# Altium PCB attenuator.PcbDoc
Units mm, origin at the board's own origin, x right, y up, seen from the top; angles counter-clockwise.
Board outline 25 x 21 mm, 2 copper layers (Top Layer, Bottom Layer), stack 0.581 mm thick; 16 components, 12 nets, 62 pads, 52 vias.
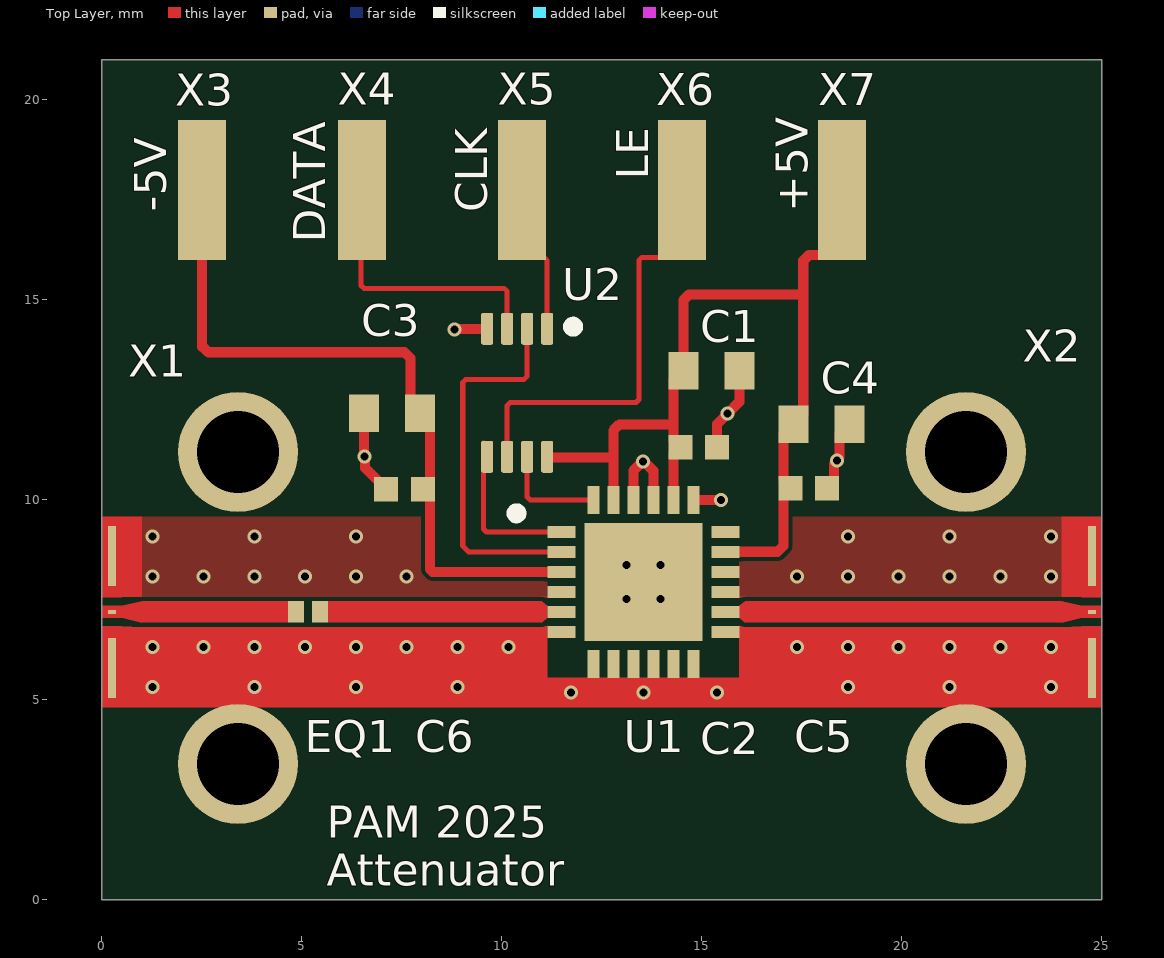
[diagram p0: Top Layer view]
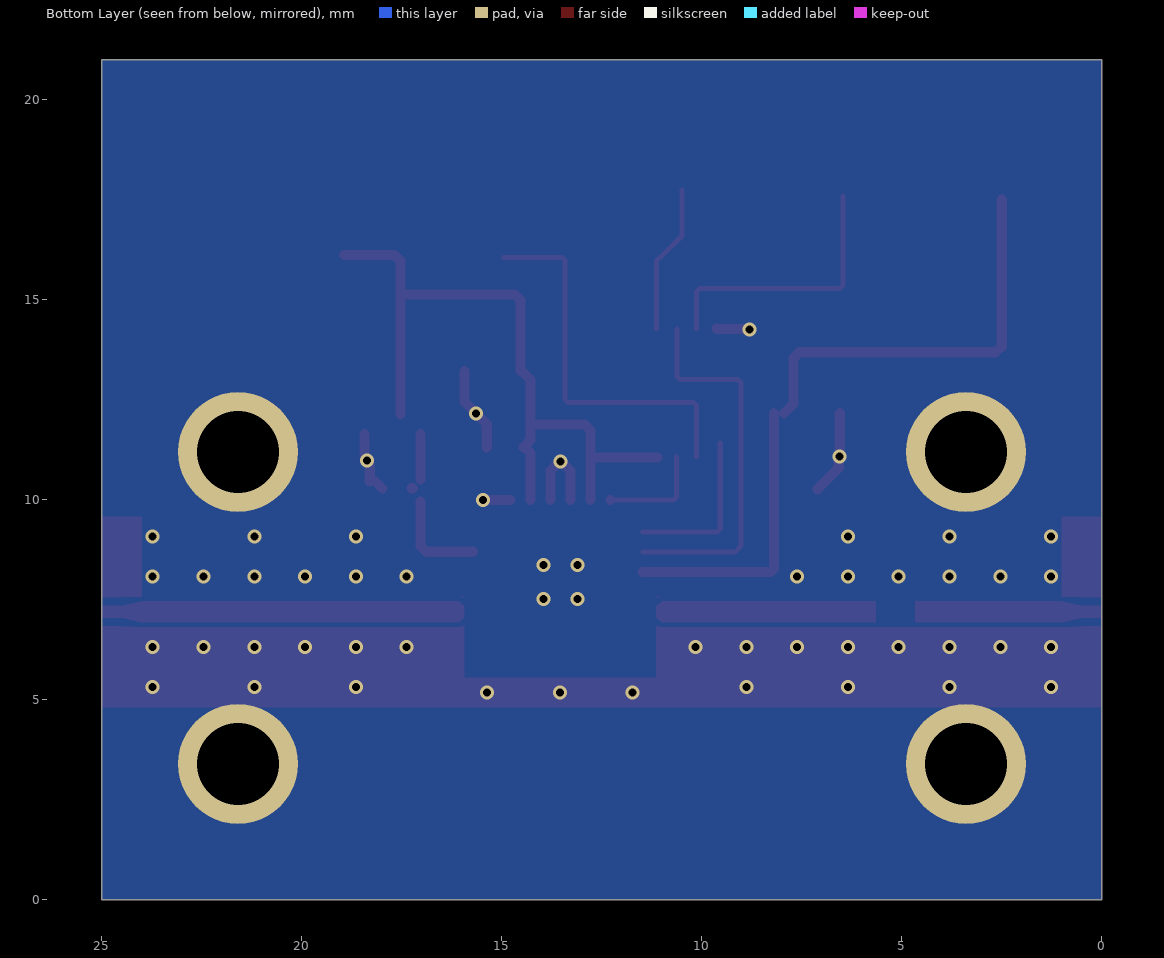
[diagram p1: Bottom Layer view, seen from below]
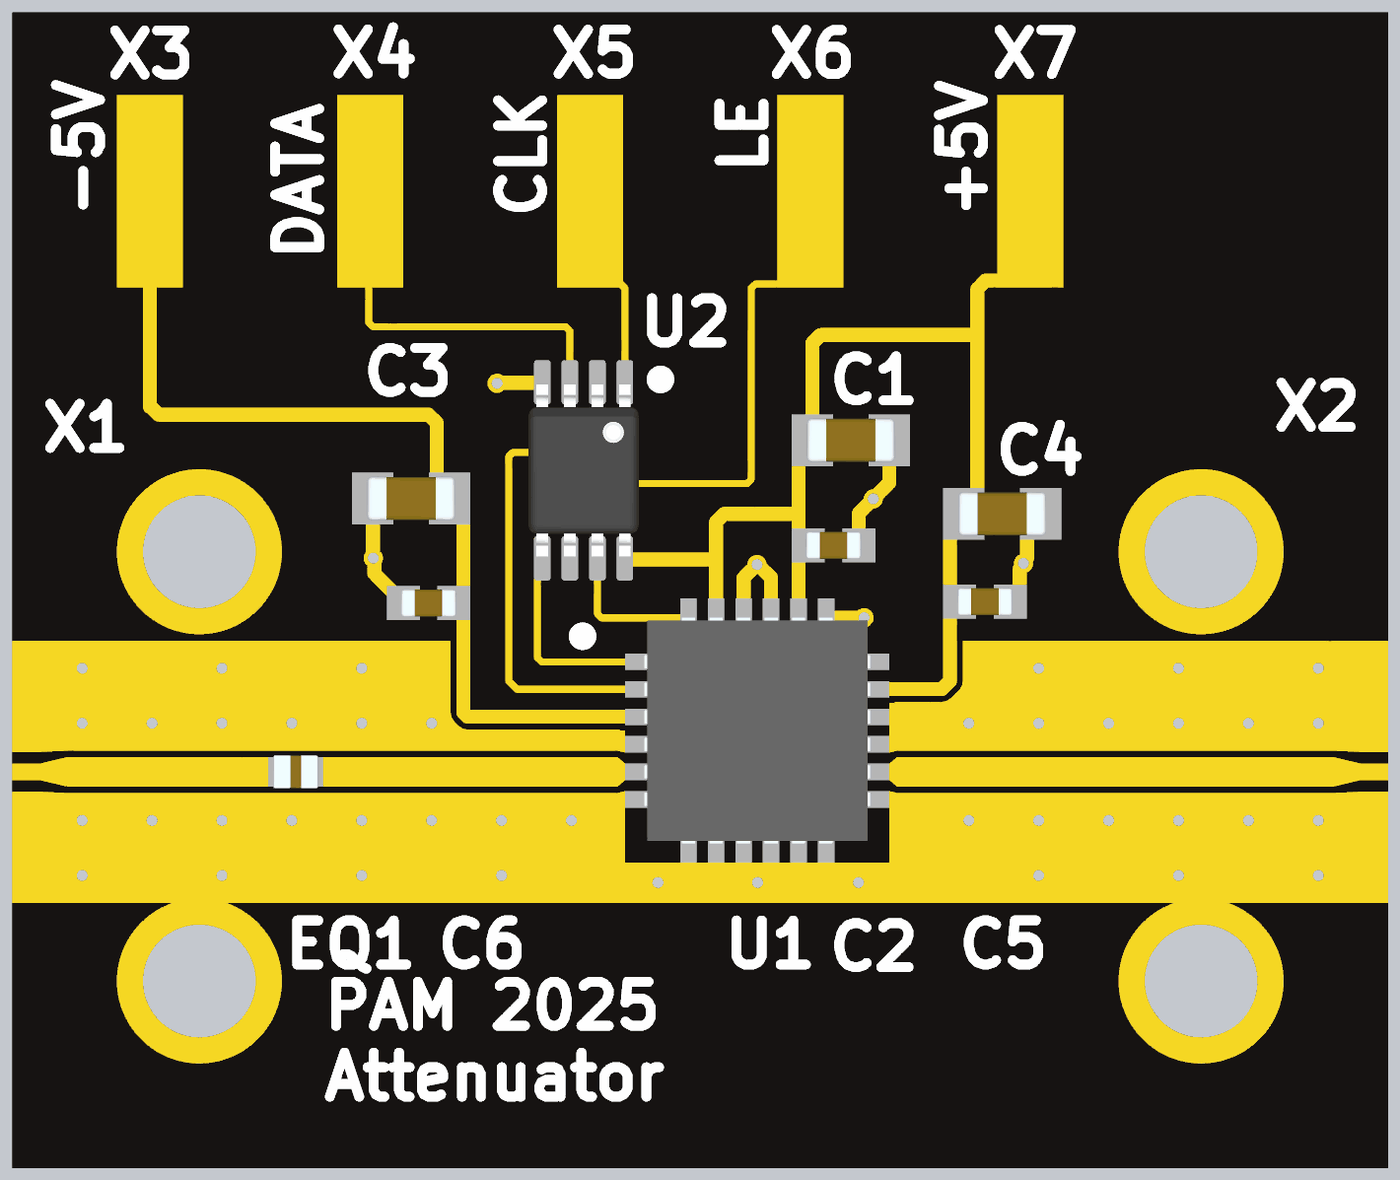
[diagram p2: 3D render of the assembled board from above, using the file's embedded part models]

## Layer stack, top to bottom
Top Layer: signal copper 0.0356
Dielectric 1: dielectric 0.51, Rogers 4350B, Dk 3.48
Bottom Layer: signal copper 0.0356

## Board outline
0,0 25,0 25,21 0,21

## Design rules (kind name [scope] priority, off if disabled: settings)
Clearance [All] p1: gap=0.1 ignorepadtopadclearanceinfootprint=FALSE
HoleSize [All] p1: absolutevalues=TRUE maxlimit=5 minlimit=0.01 maxpercent=80.000 minpercent=20.000
MinimumSolderMaskSliver [All] p1: minsoldermaskwidth=0.15
PlaneConnect [All] p1: planeconnectstyle=Direct reliefexpansion=0.508 reliefentries=4 reliefconductorwidth=0.254 reliefairgap=0.254
PolygonConnect [All] p1: connectstyle=Direct reliefconductorwidth=0.254 reliefentries=4 polygonreliefangle="90 Angle" airgapwidth=0.254
RoutingVias [All] p1: holewidth=0.711 width=1.27 viastyle="Through Hole" minholewidth=0.1 minwidth=0.01 maxholewidth=5 maxwidth=5
SilkToSilkClearance [All] p1: silktosilkclearance=0.15
SilkToSolderMaskClearance [IsPad] p1: minsilkscreentomaskgap=0.15 clearancetoexposedcopper=TRUE
SolderMaskExpansion [All] p1: expansion=0.102 istentingtop=FALSE
SupplyNets "Schematic Supply Nets" [InNet('GND')] p1: voltage=0.000
Width [All] p1: maxlimit=0.254 minlimit=0.125 preferedwidth=0.254
25 further rules are at their usual default settings.

## Classes and differential pairs
component class attenuator: C1 C2 C3 C4 C5 C6 U1 U2 X1 X2 X3 X4 X5 X6 X7

## Components (designator, comment, footprint, x,y, rotation, side; value= is the part's Value field where it differs from the comment)
C1 "1000 pF" C1000pF__C100nF 15.236,13.226 r0 top value=1nF
C2 "100 pF" C100pF 14.921,11.318 r0 top
C3 "1000 pF" C1000pF__C100nF 7.247,12.167 r0 top value=1nF
C4 "1000 pF" C1000pF__C100nF 17.987,11.889 r0 top value=1nF
C5 "100 pF" C100pF 17.672,10.291 r0 top
C6 "100 pF" C100pF 7.564,10.267 r0 top
EQ1 "AEQ05472-10" EQ_AEQ05472 5.15,7.2 r0 top locked
U1 "HMC1018ALP4E" ATT_HMC101018ALPE 13.537,7.95 r0 top
U2 "SN74LVC3G07DCUT" Buf_SN74LVC3G07DCUT 10.381,12.679 r270 top
X1 "Solder Pad" "CPW EDGE CONNECTOR" 0.25,7.2 r90 top
X2 "Solder Pad" "CPW EDGE CONNECTOR" 24.75,7.2 r270 top
X3 "Solder Pad" "Solder Pad" 2.5,17.75 r0 top
X4 "Solder Pad" "Solder Pad" 6.5,17.75 r0 top
X5 "Solder Pad" "Solder Pad" 10.5,17.75 r0 top
X6 "Solder Pad" "Solder Pad" 14.5,17.75 r0 top
X7 "Solder Pad" "Solder Pad" 18.5,17.75 r0 top

## Footprints (in the part's own frame and the unit in brackets; to place one, negate y for a bottom-side part, rotate by r counter-clockwise, add the part's x,y. Pads: shape width x height; smd on the part's side, far side on the other; paste and mask are expansions set on the pad)
ATT_HMC101018ALPE [mm]
  rect 0.7x0.3 smd: 1(-2.05,1.25) 2(-2.05,0.75) 3(-2.05,0.25) 4(-2.05,-0.25) 5(-2.05,-0.75) 6(-2.05,-1.25) 13(2.05,-1.25) 14(2.05,-0.75) 15(2.05,-0.25) 16(2.05,0.25) 17(2.05,0.75) 18(2.05,1.25)
  rect 0.3x0.7 smd: 7(-1.25,-2.05) 8(-0.75,-2.05) 9(-0.25,-2.05) 10(0.25,-2.05) 11(0.75,-2.05) 12(1.25,-2.05) 19(1.25,2.05) 20(0.75,2.05) 21(0.25,2.05) 22(-0.25,2.05) 23(-0.75,2.05) 24(-1.25,2.05)
  rect 2.95x2.95 smd: 25(0,0)
  silkscreen extent -3.3,1.59 -3.05,1.84, body extent -2.05,-2.05 2.05,2.05, height 1
Buf_SN74LVC3G07DCUT [mm] "SOP, 8-Leads, Body 2.4x2.1mm, Pitch 0.5mm, IPC Medium Density"
  rrect33% 0.8x0.3 smd: 1(-1.6,0.75) 2(-1.6,0.25) 3(-1.6,-0.25) 4(-1.6,-0.75) 5(1.6,-0.75) 6(1.6,-0.25) 7(1.6,0.25) 8(1.6,0.75)
  silkscreen extent -1.78,1.27 -1.53,1.52, body extent -1.56,-1 1.56,1, height 0.9
C100pF [mm]
  rect 0.6x0.62 smd: 1(-0.46,0) 2(0.46,0)
  body extent -0.5,-0.25 0.5,0.25, height 0.55
C1000pF__C100nF [mm]
  rect 0.75x0.94 smd: 1(-0.7,0) 2(0.7,0)
  body extent -0.8,-0.4 0.8,0.4, height 0.9
"CPW EDGE CONNECTOR" [mm]
  rect 0.1x0.2 smd paste-2539.97 mask-10: 1(0,0)
  rect 1.5x0.2 smd paste-2539.97 mask-10: 2(-1.4,0) 3(1.4,0)
  Top Layer region: -2.383,0.25 -0.361,0.25 -0.361,-0.25 -0.383,-0.75 -2.383,-0.75
  Top Layer region: -0.15,0.25 0.15,0.25 0.15,-0.25 0.269,-0.75 -0.269,-0.75 -0.15,-0.25
  Top Layer region: 2.383,0.25 0.361,0.25 0.361,-0.25 0.383,-0.75 2.383,-0.75
EQ_AEQ05472 [mm]
  rect 0.4x0.538 smd: 1(-0.3,0) 2(0.3,0)
  body extent -0.4,-0.3 0.4,0.3, height 0.14
"Solder Pad" [mm]
  rect 1.2x3.5 smd paste-2539.97: 1(0,0)

## Part data
C1 C3 C4: library part C1000pF_GCM1885C1H102FA16D, "Ceramic Capacitor, Multilayer, Ceramic, 50V, 1% +Tol, 1% -Tol, C0G, 30ppm/Cel TC, 0.001uF, Surface Mount, 0603", Capacitor Type=Ceramic, Case/Package=0603, Manufacturer=Murata, Manufacturer Part Number=GCM1885C1H102FA16D, Max Operating Temperature=125°C, Min Operating Temperature=-55°C, Package Shape=Rectangular, Rated DC Voltage (URdc)=50V, Supplier Part Number=81-GCM1885C1H102FA6D, Temperature Characteristics Code=C0G, Tolerance  (fill in as +-)=1%, Category="Ceramic Capacitors", ComponentLink1Description=https://datasheet.ciiva.com:443/pdfs/VipMasterIC/IC/MURE/MURE-S-A0004370842/MURE-S-A0004372260-1.pdf?src-supplier=IHS+Markit, ComponentLink1URL=https://datasheet.ciiva.com:443/pdfs/VipMasterIC/IC/MURE/MURE-S-A0004370842/MURE-S-A0004372260-1.pdf?src-supplier=IHS+Markit, Dielectric Material=Ceramic, Mounting Technology="Surface Mount", Multilayer=Yes, Packaging="Tape and Reel", Pins=2, Pricing="1=0.35, 10=0.229, 50=0.229, 100=0.138, 1000=0.092, 10000=0.074 (USD)", Reach SVHC Compliant=Yes, Reference Standard=AEC-Q200, RoHS=Yes, RoHS Compliant=Yes, Stock=27229, Supplier=Mouser, Termination=Wraparound, Tolerance (fill in as +-)=1%
C2 C5 C6: library part C100pF_GRM1555C2A101FA01D, "Multilayer Ceramic Capacitors MLCC - SMD/SMT 100 pF 100 VDC 1% 0402 C0G (NP0)", Manufacturer=Murata, Manufacturer Part Number=GRM1555C2A101FA01D, Supplier Part Number=81-GRM1555C2A11FA1D, Pricing="1=0.18, 10=0.119, 50=0.119, 100=0.06, 1000=0.039, 10000=0.035 (USD)", RoHS=No, Stock=21646, Supplier=Mouser
EQ1: library part EQ_AEQ05472-10, "Rf Filter Gain Equalizer 2SMD", Manufacturer="Knowles Dielectric Labs", Supplier Part Number=1761-1006-ND, ComponentLink1Description=http://www.mouser.com/ds/2/110/Dielectriclaboratories_EW_Series-340573.pdf?src-supplier=Mouser, ComponentLink1URL=http://www.mouser.com/ds/2/110/Dielectriclaboratories_EW_Series-340573.pdf?src-supplier=Mouser, ComponentLink2Description=http://www.knowlescapacitors.com/getattachment/69df7735-7ed2-4c4f-903b-a99acda4fa2d/Gain-Equalizers.aspx?src-supplier=Digikey, ComponentLink2URL=http://www.knowlescapacitors.com/getattachment/69df7735-7ed2-4c4f-903b-a99acda4fa2d/Gain-Equalizers.aspx?src-supplier=Digikey, Manufacturer Part Number=AEQ05472-10, Pricing="10=7.145, 20=6.5195, 30=6.203, 50=5.8498, 70=5.64214, 100=5.4415, 250=5.00556, 500=4.7401, 1000=4.51981 (USD)", RoHS=Yes, Stock=390, Supplier=Digikey
U1: library part Att_HMC1018ALP4E, "Attenuators Attenuators", Manufacturer_Name="Analog Devices", Mouser Part Number=584-HMC1018ALP4E, Datasheet Link=https://www.analog.com/media/en/technical-documentation/data-sheets/hmc1018a.pdf, Geometry.Height=1mm, Manufacturer_Part_Number=HMC1018ALP4E, Mouser Price/Stock=https://www.mouser.co.uk/ProductDetail/Analog-Devices/HMC1018ALP4E?qs=XflvcvBPbgW0VxFFfcxVBA%3D%3D
U2: library part Buf_SN74LVC3G07DCUT, "Buffer, LVC/LCX/Z Series, 3-Func, 1-Input, CMOS, PDSO8", Case/Package=VSSOP, Load Capacitance (CL)=50pF, Manufacturer="Texas Instruments", Max Operating Temperature=125°C, Max Supply Voltage=5.5V, Min Operating Temperature=-40°C, Min Supply Voltage=1.65V, Nominal Supply Voltage=1.8V, Package Body Material=Plastic, Package Shape=Rectangular, Package Style="SMALL OUTLINE, VERY THIN PROFILE, SHRINK PITCHMeter", Peak Reflow Temperature (Cel)=260°C, Power Supplies=3.3V, Supplier Part Number=595-SN74LVC3G07DCUT, Temperature Grade=AUTOMOTIVE, Category="Buffers, Drivers and Transceivers", Channels=3, ComponentLink1Description=https://www.ti.com:443/lit/ds/symlink/sn74lvc3g07.pdf?src-supplier=IHS+Markit, ComponentLink1URL=https://www.ti.com:443/lit/ds/symlink/sn74lvc3g07.pdf?src-supplier=IHS+Markit, ComponentLink2Description=https://datasheet.ciiva.com/22704/1831202-22704940.pdf?src-supplier=Element14, ComponentLink2URL=https://datasheet.ciiva.com/22704/1831202-22704940.pdf?src-supplier=Element14, ComponentLink3Description=https://datasheet.ciiva.com/15094/getdatasheetpartid-42252-15094217.pdf?src-supplier=Verical, ComponentLink3URL=https://datasheet.ciiva.com/15094/getdatasheetpartid-42252-15094217.pdf?src-supplier=Verical, ComponentLink4Description=https://datasheet.ciiva.com/41455/001017196-da-01-en-ic-b-dvr-trp-sn74lvc3g07dcut-vssop-8-tid-41455972.pdf?src-supplier=Conrad, ComponentLink4URL=https://datasheet.ciiva.com/41455/001017196-da-01-en-ic-b-dvr-trp-sn74lvc3g07dcut-vssop-8-tid-41455972.pdf?src-supplier=Conrad, ComponentLink5Description=https://datasheet.ciiva.com/7744/sn74lvc3g07-7744042.pdf?src-supplier=Element14, ComponentLink5URL=https://datasheet.ciiva.com/7744/sn74lvc3g07-7744042.pdf?src-supplier=Element14, ComponentLink6Description=https://datasheet.ciiva.com/6622/sn74lvc3g07-6622474.pdf?src-supplier=Digikey, ComponentLink6URL=https://datasheet.ciiva.com/6622/sn74lvc3g07-6622474.pdf?src-supplier=Digikey, ComponentLink7Description=https://datasheet.ciiva.com/6622/sn74lvc3g07-6622477.pdf?src-supplier=Digikey, ComponentLink7URL=https://datasheet.ciiva.com/6622/sn74lvc3g07-6622477.pdf?src-supplier=Digikey, ComponentLink8Description=https://datasheet.ciiva.com/6622/sn74lvc3g07-6622478.pdf?src-supplier=Digikey, ComponentLink8URL=https://datasheet.ciiva.com/6622/sn74lvc3g07-6622478.pdf?src-supplier=Digikey, Height - Seated (Max)=0.9mm, JESD-30 Code=R-PDSO-G8, JESD-609 Code=e4, Length=2.3mm, Load/Preset Input=Yes, Logic Type=BUFFER, Manufacturer Part Number=SN74LVC3G07DCUT, Max I(ol)=24mA, Moisture Sensitivity Level=1, Number of Inputs=1, Output Characteristics=OPEN-DRAIN, Packaging="Tape and Reel", Pins=8, Pricing="1=1.13, 10=0.738, 50=0.738, 100=0.584, 1000=0.486, 10000=0.482 (USD)", Prop. Delay@Nom-Sup=3.7ns, Propagation Delay (tpd)=7.8ns, Qualification Status="Not Qualified", Reach SVHC Compliant=Yes, RoHS=Yes, RoHS Compliant=Yes, Schmitt Trigger=No, Stock=5143, Supplier=Mouser, Surface Mount=Yes, Technology=CMOS, Terminal Finish=Nickel, Terminal Form="Gull Wing", Terminal Pitch=0.5mm, Terminal Position=DUAL, Width=2mm
X1 X2: library part "RF  CPW Solder Pad", "Solder pad for RF Coplanar Waveguide Rogers 4350B Thickness 0.020\" Copper 1oz"
X3 X4 X5 X6 X7: "Pad to solder wires to"

## Free pads (board coordinates)
  round 3 hole 2.05 mask-2539.97: 1(3.4,3.4) 1(3.4,11.2) 1(21.6,3.4) 1(21.6,11.2)

## Via types
v1: diameter 0.35, hole 0.2, Top Layer to Bottom Layer, 52 vias

## Nets (pads, with @x,y where several pads share a name; then routed paths per layer and width w, separated by ;. In a path a pad name is that pad's centre, name@x,y a point inside that pad or via, vN(x,y) a via of type N, cw(c..) or ccw(c..) an arc to the next point about the centre after c; other vN are vias at no path point)
+5V: C1.1 C2.1 C4.1 C5.1 U1.17 U1.20 U1.23 U2.8 X7.1 | length 22.2
  Top Layer w0.254: U2.8@11.108,11.059 12.787,11.059 ; U1.23 12.787,11.059 ; 14.268,11.888 12.936,11.888 12.787,11.739 12.787,11.059 ; U1.20 14.287,11.176 C2.1@14.43,11.319 ; C2.1 14.288,11.491 14.288,11.65 14.288,13.009 C1.1@14.501,13.222 ; C1.1 14.536,14.99 14.685,15.139 17.535,15.139 ; U1.17@15.731,8.704 16.89,8.704 17.039,8.853 17.039,9.959 ; C5.1@17.039,10.516 C4.1@17.039,11.641 ; C5.1@17.223,10.292 C5.1@17.255,10.292 ; C4.1@17.535,12.137 17.535,15.139 ; X7.1@18.943,16.127 17.684,16.127 17.535,15.978 17.535,15.139
-5V: C3.2 C6.2 U1.3 X3.1 | length 17.7
  Top Layer w0.254: 2.503,13.83 X3.1@2.503,17.507 ; 2.512,13.839 2.661,13.69 7.565,13.69 7.714,13.541 7.714,12.4 C3.2 ; C3.2@8.198,12.167 8.198,10.267 8.198,8.274 8.272,8.2 U1.3
CLK: U2.1 X5.1 | length 3.7
  Top Layer w0.127: X5.1 10.5,16.6 11.037,16.063 11.057,16.063 11.131,15.989 U2.1
CLK_B: U1.24 U2.7 | length 2.7
  Top Layer w0.127: U2.7 10.631,10.073 10.705,9.999 U1.24
  Top Layer w0.254: U1.24 U1.24
DATA: U2.3 X4.1 | length 6.9
  Top Layer w0.127: X4.1@6.476,17.592 6.476,15.363 6.551,15.289 10.057,15.289 10.131,15.215 U2.3
DATA_B: U1.1 U2.5 | length 4.1
  Top Layer w0.127: U2.5@9.542,11.422 9.542,9.274 9.616,9.2 U1.1
GND: C1.2 C2.2 C3.1 C4.2 C5.2 C6.1 pad.1 U1.4 U1.6 U1.7 U1.8 U1.9 U1.10 U1.11 U1.12 U1.13 U1.15 U1.16 U1.19 U1.21 U1.22 U1.25 U2.4 X1.2 X1.3 X2.2 X2.3 | length 9.3
  Top Layer w0.254: C3.1 6.553,12.16 6.553,11.091 v1(6.56,11.084) 6.578,11.066 6.578,10.803 7.104,10.277 C6.1 ; v1(8.809,14.261) 8.818,14.27 9.622,14.27 U2.4 ; U1.22 13.287,10.731 13.522,10.966 13.552,10.966 13.787,10.731 U1.21 ; U1.19 v1(15.476,10) ; C2.2 15.381,11.897 v1(15.644,12.161) 15.936,12.452 C1.2 ; C5.2@17.988,10.287 C5.2@18.161,10.46 ; C5.2@18.305,10.464 v1@18.305,10.895 ; v1@18.372,11.014 18.439,11.081 C4.2@18.439,11.641
  other v1: 11.731,5.189 13.542,5.189 15.376,5.189 1.27,5.317 3.81,5.317 6.35,5.317 8.89,5.317 18.65,5.317 21.19,5.317 23.73,5.317 1.27,6.317 2.54,6.317 3.81,6.317 5.08,6.317 6.35,6.317 7.62,6.317 8.89,6.317 10.16,6.317 17.38,6.317 18.65,6.317 19.92,6.317 21.19,6.317 22.46,6.317 23.73,6.317 13.112,7.525 13.962,7.525 1.27,8.083 2.54,8.083 3.81,8.083 5.08,8.083 6.35,8.083 7.62,8.083 17.38,8.083 18.65,8.083 19.92,8.083 21.19,8.083 22.46,8.083 23.73,8.083 13.112,8.375 13.962,8.375 1.27,9.083 3.81,9.083 6.35,9.083 18.65,9.083 21.19,9.083 23.73,9.083 13.531,10.966 18.372,10.988
LE: U2.6 X6.1 | length 9.7
  Top Layer w0.127: U2.6 10.131,12.362 10.205,12.436 13.35,12.436 13.424,12.511 13.424,15.991 13.498,16.065 X6.1@14.966,16.065
LE_B: U1.2 U2.2 | length 9.5
  Top Layer w0.127: U2.2@10.623,14.271 10.623,13.081 10.549,13.007 9.095,13.007 9.021,12.933 9.021,8.849 9.17,8.7 U1.2
NetEQ1_2: EQ1.2 U1.5
RFin: EQ1.1 X1.1
RFout: U1.14 X2.1
pads on no net: U1.18

## Polygon pours and split planes (outlines as drawn)
GND on Bottom Layer "GND_L02_P003" (solid, pour order 3): 0,0 25,0 25,21 0,21
GND on Top Layer "GND_L01_P005" (solid, pour order 5): 24,9.583 15.936,9.583 15.936,7.583 24,7.583
GND on Top Layer "GND_L01_P004" (solid, pour order 4): 0.999,9.583 11.138,9.583 11.138,7.583 0.999,7.583

## Other copper
Top Layer:
  rectangle net NetEQ1_2: 5.646,6.931 10.996,7.468
  rectangle net RFin: 1,6.931 4.669,7.469
  rectangle net RFout: 16.078,6.931 24,7.469
  region net GND: 0.869,6.817 11.138,6.817 11.138,4.817 0.869,4.817
  region net GND: 11.138,6.85 11.138,6.817 10.996,6.817
  region net GND: 11.138,7.55 11.138,7.583 10.996,7.583
  region net GND: 15.937,6.85 15.937,6.817 16.079,6.817
  region net GND: 15.936,7.55 15.936,7.583 16.078,7.583
  region net RFout: 16.078,7.469 15.937,7.35 15.937,7.05 16.078,6.931
  region net NetEQ1_2: 10.996,7.469 11.137,7.35 11.137,7.05 10.996,6.931
  region net GND: 11.137,4.817 15.937,4.817 15.937,5.551 11.137,5.551
  region net GND: 15.937,4.817 24.213,4.817 24.213,6.817 15.937,6.817

## Silkscreen, mask and mechanical layers (free items; w line width, h text height)
Top Overlay:
  text "LE" at 13.658,18.002 h0.8 r90
  text "-5V" at 1.603,17.2 h0.8 r90
  text "CLK" at 9.636,17.189 h0.8 r90
  text "+5V" at 17.646,17.189 h0.8 r90
  text "DATA" at 5.586,16.425 h0.8 r90
  text "PAM 2025 / Attenuator" at 5.625,0.36 h0.8
Top Solder:
  circle w1.5: c3.4,11.2 r0.75
  circle w1.5: c3.4,3.4 r0.75
  circle w1.5: c21.6,3.4 r0.75
  circle w1.5: c21.6,11.2 r0.75
  region: 0,0 25,0 25,21 0,21
Bottom Solder:
  circle w1.5: c3.4,11.2 r0.75
  circle w1.5: c3.4,3.4 r0.75
  circle w1.5: c21.6,3.4 r0.75
  circle w1.5: c21.6,11.2 r0.75
  region: 0,0 25,0 25,21 0,21
Board:
  the board outline again, w0.1